# Altium PCB Acond_Presion_PCB.PcbDoc
Units mil, origin at the board's own origin, x right, y up, seen from the top; angles counter-clockwise.
Board outline 3940 x 1970 mil, 2 copper layers (Top Layer, Bottom Layer); 46 components, 32 nets, 126 pads, 0 vias.
Unrouted connection lines stored in the file: 1.
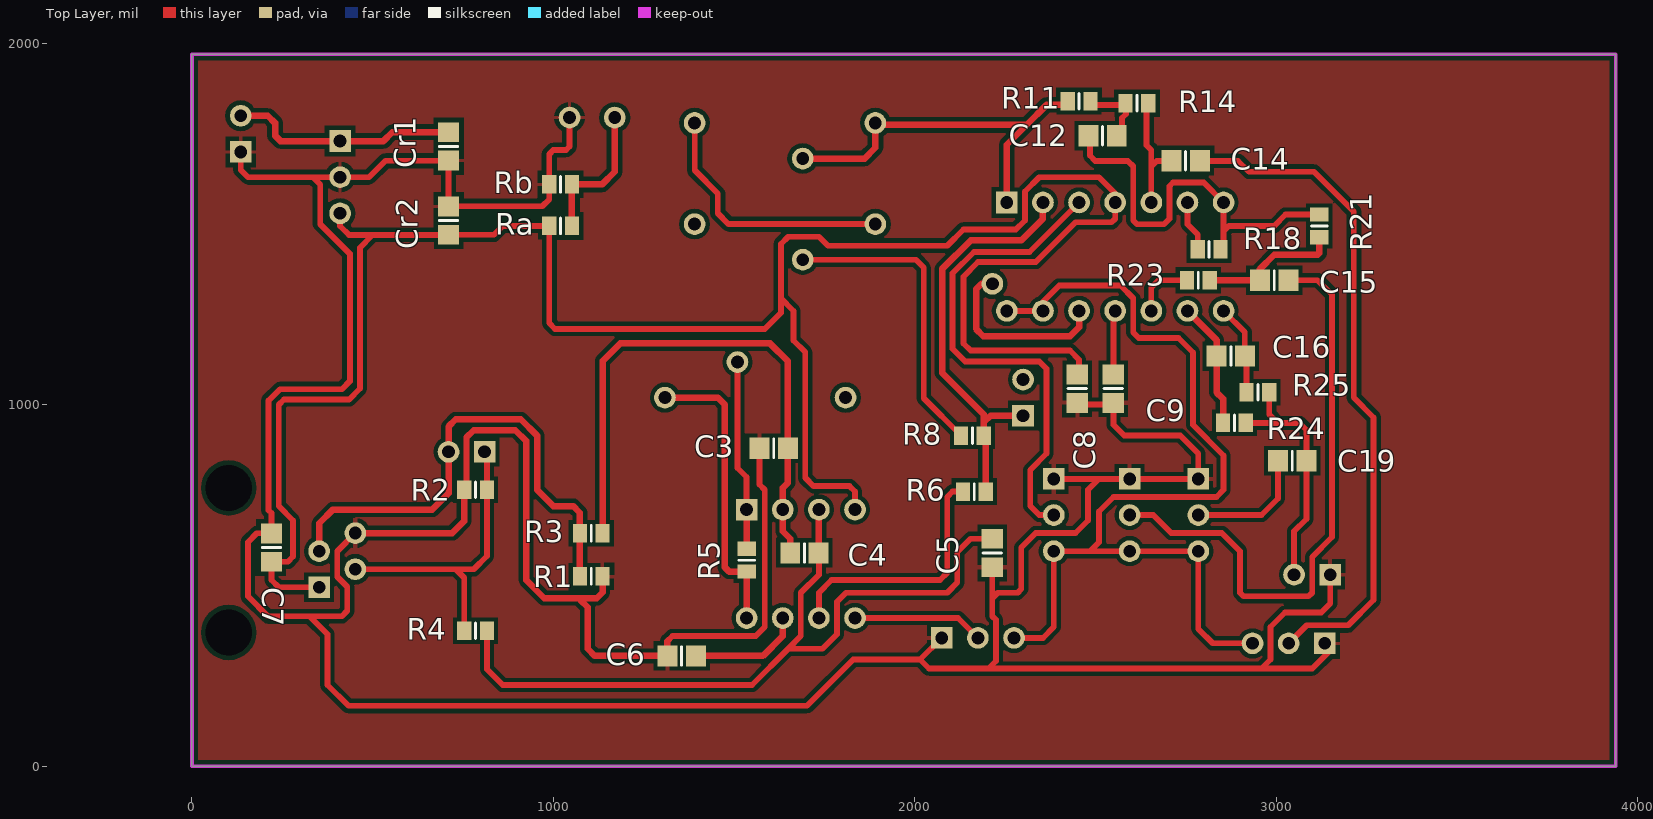
[diagram p0: Top Layer view]
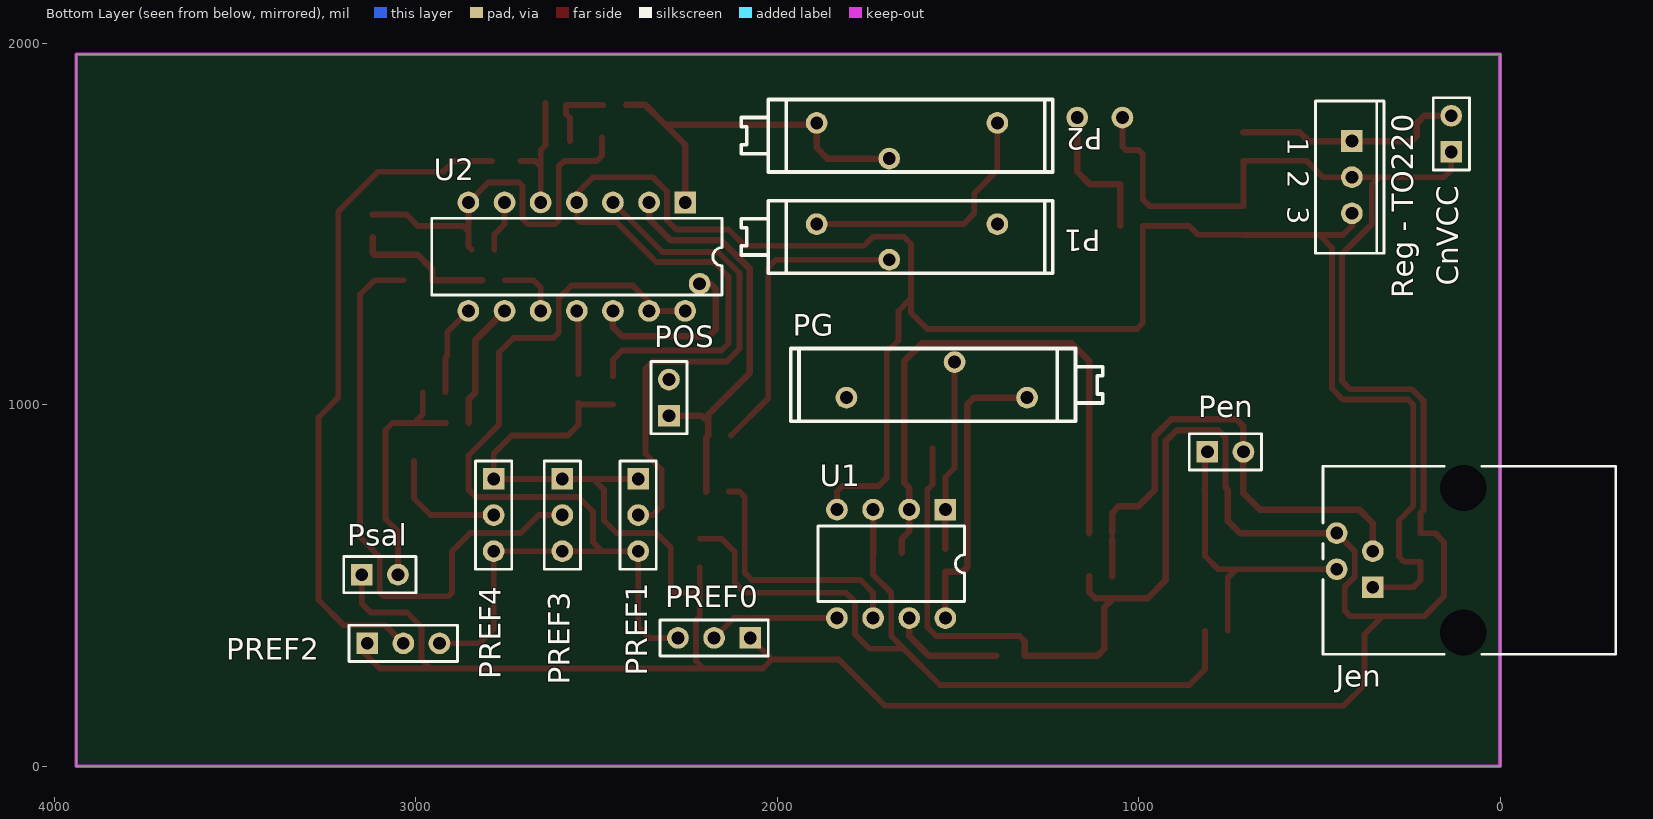
[diagram p1: Bottom Layer view, seen from below]

## Layer stack, top to bottom
Top Layer: signal copper 1.4
Dielectric: dielectric 12.6, FR-4, Dk 4.8
Bottom Layer: signal copper 1.4

## Board outline
0,1970 0,0 3940,0 3940,1970

## Design rules (kind name [scope] priority, off if disabled: settings)
Clearance [All] p1: gap=12
PolygonConnect [All] p1: connectstyle=Relief reliefconductorwidth=10 reliefentries=4 polygonreliefangle="90 Angle"
RoomDefinition Fuente_y_Referencia [InComponentClass('Fuente_y_Referencia')] p1: confinementstyle=ConfineIn formatcopy=TRUE lockcomponents=FALSE outline 0,875 2625,875 2625,1968.5 0,1968.5
RoomDefinition Acondicionamiento_Snl [InComponentClass('Acondicionamiento_Snl')] p2: confinementstyle=ConfineIn formatcopy=TRUE lockcomponents=FALSE outline -435,-5 3945,-5 3945,1970 -435,1970
RoutingCorners [All] p1: cornerstyle=45-Degree minsetback=50 maxsetback=100
RoutingLayers [All] p1: top layer_v5=TRUE bottom layer_v5=FALSE
RoutingTopology [All] p1: topology=Daisy_Balanced
RoutingVias [All] p1: holewidth=28 width=50 viastyle="Through Hole" minholewidth=28 minwidth=50 maxholewidth=28 maxwidth=50
SilkscreenOverComponentPads [All] p1: minsilkscreentomaskgap=1
SolderMaskExpansion [All] p1: expansion=4
Width [All] p1: maxlimit=20 minlimit=16 preferedwidth=18
24 further rules are at their usual default settings.

## Classes and differential pairs
component class Fuente_y_Referencia: C8 C9 CnVCC Cr1 Cr2 Ra Rb "Reg - TO220"
component class Acondicionamiento_Snl: C3 C4 C5 C6 C7 C12 C14 C15 C16 C19 Jen P1 P2 Pen PG POS PREF0 PREF1 PREF2 PREF3 PREF4 Psal R1 R2 R3 R4 R5 R6 R8 R11 R14 R18 R21 R23 R24 R25 U1 U2

## Components (designator, comment, footprint, x,y, rotation, side; value= is the part's Value field where it differs from the comment)
C3 "Cap" 6-0805_M 1610,880 r180 top
C4 "Cap" 6-0805_M 1695,590 r180 top
C5 "Cap" 6-0805_M 2215,590 r90 top
C6 "Cap" 6-0805_M 1355,305 r180 top
C7 "Cap" 6-0805_M 220,605 r90 top
C8 "Cap" 6-0805_M 2450,1045 r270 top
C9 "Cap" 6-0805_M 2550,1045 r270 top
C12 "Cap" 6-0805_M 2520,1745 r0 top
C14 "Cap" 6-0805_M 2750,1675 r0 top
C15 "Cap" 6-0805_M 2995,1345 r0 top
C16 "Cap" 6-0805_M 2875,1135 r180 top
C19 "Cap" 6-0805_M 3045,845 r180 top
CnVCC "Header 2" HDR1X2 135,1700 r90 bottom
Cr1 "Cap" 6-0805_M 710,1715 r270 top
Cr2 "Cap" 6-0805_M 710,1510 r90 top
Jen "15-43-8564" 15-43-8564 -320,570 r90 bottom
P1 "Preset" "Preset Largo" 2025,1565 r0 bottom
P2 "Preset" "Preset Largo" 2025,1845 r0 bottom
Pen "Header 2" HDR1X2 810,870 r180 bottom
PG "Preset" "Preset Largo" 1175,955 r180 bottom
POS "Header 2" HDR1X2 2300,970 r90 bottom
PREF0 "Header 3" HDR1X3 2075,355 r0 bottom
PREF1 "Header 3" HDR1X3 2385,795 r270 bottom
PREF2 "Header 3" HDR1X3 3135,340 r180 bottom
PREF3 "Header 3" HDR1X3 2595,795 r270 bottom
PREF4 "Header 3" HDR1X3 2785,795 r270 bottom
Psal "Header 2" HDR1X2 3150,530 r180 bottom
R1 "Res1" 6-0805_L 1105,525 r180 top
R2 "Res1" 6-0805_L 785,765 r0 top
R3 "Res1" 6-0805_L 1105,645 r180 top
R4 "Res1" 6-0805_L 785,375 r180 top
R5 "Res1" 6-0805_L 1535,570 r90 top
R6 "Res1" 6-0805_L 2165,760 r180 top
R8 "Res1" 6-0805_L 2160,915 r0 top
R11 "Res1" 6-0805_L 2455,1840 r180 top
R14 "Res1" 6-0805_L 2615,1835 r180 top
R18 "Res1" 6-0805_L 2815,1430 r180 top
R21 "Res1" 6-0805_L 3120,1495 r90 top
R23 "Res1" 6-0805_L 2785,1345 r0 top
R24 "Res1" 6-0805_L 2885,950 r180 top
R25 "Res1" 6-0805_L 2950,1035 r180 top
Ra "Res1" 6-0805_L 1020,1495 r180 top
Rb "Res1" 6-0805_L 1020,1610 r0 top
"Reg - TO220" "Volt Reg" TO-220-AB 410,1630 r270 bottom
U1 "AD620 / INA122" N-8 1685,560 r0 bottom
U2 "MC34074" Q-14 2555,1410 r0 bottom

## Footprints (in the part's own frame and the unit in brackets; to place one, negate y for a bottom-side part, rotate by r counter-clockwise, add the part's x,y. Pads: shape width x height; smd on the part's side, far side on the other; paste and mask are expansions set on the pad)
6-0805_L [mm] "Chip Resistor, Body 2.0x1.2mm, IPC High Density"
  rect 1x1.3 smd: 1(-0.8,0) 2(0.8,0)
  silkscreen extent 0,-0.55 0,0.55, body extent -1.07,-0.7 1.07,0.7, height 0.7
6-0805_M [mm] "Chip Resistor, Body 2.0x1.2mm, IPC Low Density"
  rect 1.4x1.5 smd: 1(-1,0) 2(1,0)
  silkscreen extent 0,-0.65 0,0.65, body extent -1.07,-0.7 1.07,0.7, height 0.7
15-43-8564 [mm] "Connector; PCB Jack, Thru-Hole; 1-Port, 6 Positions, 4 Loaded; Unshielded without Lightpipes; Right Angle"
  rect 1.524x1.524 hole 0.9: 1(-1.905,17.07)
  round 1.524 hole 0.9: 2(-0.635,19.61) 3(0.635,17.07) 4(1.905,19.61)
  round 2.95 hole 3.25 unplated: MH1(-5.08,10.72) MH2(5.08,10.72)
  silkscreen extent -6.6,0 6.61,20.57
HDR1X2 [mil] "Connector; Header; 2 Position"
  rect 60x60 hole 35.43: 1(0,0)
  round 60 hole 35.43: 2(100,0)
  silkscreen extent -50,-50 150,50
HDR1X3 [mil] "Connector; Header; 3 Position"
  rect 60x60 hole 35.43: 1(0,0)
  round 60 hole 35.43: 2(100,0) 3(200,0)
  silkscreen extent -50,-50 250,50
N-8 [mil] "DIP; 8 Leads; Row Spacing 7.62 mm; Pitch 2.54 mm"
  rect 60x60 hole 35.43: 1(-150,-150)
  round 60 hole 35.43: 2(-50,-150) 3(50,-150) 4(150,-150) 5(150,150) 6(50,150) 7(-50,150) 8(-150,150)
  silkscreen extent -203,-104 203,104
"Preset Largo" [mm] "4.8x19 Rectangular/Multiturn/Trimming Potentiometer"
  round 1.524 hole 0.9: 1(-3.4,1.65) 2(-8.5,4.15) 3(-16.1,1.65)
  silkscreen extent -20,0 1.91,5.1
Q-14 [mil] "DIP; 14 Leads; Row Spacing 7.62 mm; Pitch 2.54 mm"
  rect 60x60 hole 35.43: 1(-300,-150)
  round 60 hole 35.43: 2(-200,-150) 3(-100,-150) 4(0,-150) 5(100,-150) 6(200,-150) 7(300,-150) 8(300,150) 9(200,150) 10(100,150) 11(0,150) 12(-100,150) 13(-200,150) 14(-300,150)
  silkscreen extent -402,-106 402,106
TO-220-AB [mil] "TO, Thru-Hole, Vertical, Heatsink Mounted; 3 In-Line Leads; Pitch 2.54 mm"
  rect 60x60 hole 35.43: 1(-100,0)
  round 60 hole 35.43: 2(0,0) 3(100,0)
  silkscreen extent -211,-100 211,89

## Part data
C3 C4 C5 C6 C7 C8 C9 C12 C14 C15 C16 C19 Cr1 Cr2: "Capacitor"
CnVCC Pen POS Psal: "Header, 2-Pin"
Jen: "Right Angle, Standard Profile, Unshielded PCB Jack"
P1 P2 PG: library part "Preset Multivuelta", "Rectangular/Multiturn/Trimming Potentiometer"
PREF0 PREF1 PREF2 PREF3 PREF4: "Header, 3-Pin"
R1 R2 R3 R4 R5 R6 R8 R11 R14 R18 R21 R23 R24 R25 Ra Rb: "Resistor"
"Reg - TO220": "Voltage Regulator"
U1: library part AD620BN, "Low-Cost, Low-Power Instrumentation Amplifier"
U2: library part AD713BQ, "Quad Precision Low Cost High-Speed BiFET Operational Amplifier"

## Free pads (board coordinates)
  round 60 hole 35.43: 0(1045,1795) 1(1170,1795) 3(2215,1335)

## Nets (pads, with @x,y where several pads share a name; then routed paths per layer and width w, separated by ;. In a path a pad name is that pad's centre, name@x,y a point inside that pad or via, vN(x,y) a via of type N, cw(c..) or ccw(c..) an arc to the next point about the centre after c; other vN are vias at no path point)
GND: "Reg - TO220.2" C3.2 C5.1 C6.2 C7.2 C8.2 C9.2 CnVCC.1 Cr1.2 Cr2.2 Jen.4 pad.0 PREF0.1 PREF1.1 PREF2.1 PREF3.1 PREF4.1 Psal.1 R1.1 R2.1 Rb.1 | length 11260.8
  Top Layer w16: CnVCC.1 135,1650 155,1630 335,1630 ; Jen.4@452.05,647.95 Jen.4 402.05,595 402.05,524.29 430,496.34 430,430 415,415 325,415 ; R2.1 760,771.5 760,910 ; pad.0 1045,1715 1035,1705 1000,1705 988.5,1693.5 Rb.1 988.5,1568.5 969.37,1549.37 Cr2.2 Cr1.2 535.63,1675.63 490,1630 410,1630 335,1630 ; 1315.63,345.63 1330,360 1560,360 1585,385 1585,765 1570.63,779.37 C3.2 ; PREF0.1 2015,295 ; C5.1 2215,465 ; PREF1.1 2510,795 ; C8.2@2455,1000.63 2545,1000.63 C9.2 2550,945 2580,915 2735,915 2785,865 PREF4.1 PREF3.1 2510,795 ; PREF2.1@3150,320 3100,270 2960,270 ; Psal.1 3150,450 3125,425 3025,425 2985,385 2985,295.43 2960,270.43 2960,270 ; 325,415 375,365 375,225 433,167 1702,167 1830,295 2015,295 ; 325,415 210,415 155,470 155,620 179.37,644.37 C7.2 220,700.4 212,708.4 212,1011.6 243.4,1043 415,1043 437,1065 437,1418 355,1500 355,1610 335,1630 ; 2015,295 2040,270 2204.06,270 ; 2204.06,270 2225,290.94 2225,405 2215,415 2215,465 ; 2204.06,270 2960,270 ; 2215,465 2230,480 2285,480 2295,490 2295,605 2335,645 2445,645 2480,680 2480,765 2510,795
  Top Layer w18: Jen.4 720,645 753.5,678.5 R2.1 ; 760,910 780,930 895,930 925,900 925,515 975,465 1075,465 ; R1.1 1136.5,481.5 1120,465 1075,465 ; 1315.63,345.63 C6.2 1115,305 1095,325 1095,440 1075,460 1075,465
NetC3_1: C3.1 C4.2 R3.1 U1.2 | length 1575
  Top Layer w18: R3.1 1136.5,1121.5 1185,1170 1600,1170 1649.37,1120.63 C3.1 1649.37,784.37 1635,770 U1.2 1635,650 1655.63,629.37 C4.2
NetC4_1: C4.1 C5.2 R4.1 U1.3 | length 2214.2
  Top Layer w16: R4.1 816.5,268.5 860,225 1550.04,225 1650,324.96 ; C4.1@1735,589.37 1735,530 1685,480 1685,359.96 1650,324.96 ; C5.2 2154.37,629.37 2118,593 2118,508 2090,480 1810,480 1785,455 1785,365 1744.96,324.96 1650,324.96
  Top Layer w18: U1.3@1734.37,710.63 U1.3 C4.1@1735,589.37
NetC6_1: C6.1 U1.7 | length 313.4
  Top Layer w18: C6.1 1580,305 1635,360 U1.7
NetC9_1: C9.1 U2.11 | length 177.7
  Top Layer w16: C9.1 2550,1255 U2.11
NetC12_1: C12.1 R18.1 R21.2 U2.7 | length 1127.5
  Top Layer w16: C12.1@2485,1740 2485,1690 2500,1675 2590,1675 2605,1660 2605,1510 2615,1500 2690,1500 2705,1515 2705,1605 2715,1615 2800,1615 U2.7 2855,1480 ; R18.1 2855,1438.5 2855,1480 ; R21.2 3026.5,1526.5 2995,1495 2870,1495 2855,1480
NetC12_2: C12.2 R11.1 R14.2 | length 208.3
  Top Layer w16: R11.1@2481.5,1830 2585,1830 2585,1805 2573.5,1793.5 C12.2@2573.5,1730
NetC14_1: C14.1 R14.1 U2.5 | length 342.4
  Top Layer w16: R14.1@2641.5,1835 2641.5,1718.5 2655,1705 2655,1660 ; U2.5 2655,1660 ; C14.1 2670,1675 2655,1660
NetC14_2: C14.2 PREF2.2 | length 1866.1
  Top Layer w16: C14.2 2895,1675 2925,1645 3105,1645 3215,1535 3215,1020 3270,965 3270,460 3200,390 3085,390 PREF2.2
NetC15_1: C15.1 R21.1 R23.2 | length 396
  Top Layer w18: R23.2 C15.1 2955.63,1375.63 2995,1415 3115,1415 3120,1420 R21.1
NetC15_2: C15.2 PREF3.2 | length 1654.7
  Top Layer w16: PREF3.2 2660,695 2710,645 2850,645 2900,595 2900,480 2910,470 3090,470 3100,480 3100,579.06 3155,634.06 3155,1305 3115,1345 C15.2
NetC16_1: C16.1 R25.2 U2.8 | length 250.1
  Top Layer w16: U2.8 2913.5,1201.5 C16.1@2913.5,1135.87 ; C16.1 2918.5,1130.87 R25.2
NetC16_2: C16.2 R24.2 U2.9 | length 350.8
  Top Layer w18: U2.9 2835.63,1179.37 C16.2 2835.63,1034.37 2853.5,1016.5 R24.2
NetC19_2: C19.2 PREF4.2 | length 343.9
  Top Layer w16: PREF4.2 2960,695 3005.63,740.63 C19.2
NetCnVCC_2: "Reg - TO220.1" CnVCC.2 Cr1.1 | length 634.6
  Top Layer w18: CnVCC.2 210,1800 230,1780 230,1745 245,1730 410,1730 530,1730 554.37,1754.37 Cr1.1
NetP1_1: P1.1 P2.3 | length 725
  Top Layer w16: P2.3 1391.14,1648.86 1455,1585 1455,1530 1484.96,1500.04 P1.1
NetP1_2: P1.2 R8.1 | length 851.5
  Top Layer w16: P1.2 2003.39,1401.61 2025,1380 2025,1018.5 R8.1
NetP2_1: P2.1 P2.2 R11.2 U2.1 | length 1071.9
  Top Layer w18: P2.2 1861.61,1681.61 1891.14,1711.14 P2.1 1896.18,1775 2310,1775 ; U2.1 2255,1720 2310,1775 ; R11.2@2418.5,1830 2365,1830 2310,1775
NetPG_1: PG.1 R5.1 U1.8 | length 817.7
  Top Layer w18: PG.1 1455.04,1019.96 1475,1000 1475,550 1486.5,538.5 R5.1 U1.8
NetPG_2: PG.2 R5.2 U1.1 | length 527.4
  Top Layer w16: PG.2 1509.65,825.35 1535,800 U1.1
  Top Layer w18: R5.2 U1.1
NetPOS_1: POS.1 R6.1 R8.2 U2.2 | length 1163.7
  Top Layer w18: R6.1 2196.5,910 R8.2 2191.5,951.5 ; POS.1 2210,970 2191.5,951.5 ; U2.2 2355,1515 2295,1455 2155,1455 2076,1376 2076,1089 2191.5,973.5 2191.5,951.5
NetPREF0_2: PREF0.2 U1.5 | length 362.8
  Top Layer w16: U1.5 2120,410 PREF0.2
NetPREF1_2: PREF1.2 U2.3 | length 1397
  Top Layer w16: PREF1.2 2345,695 2320,720 2320,820 2365,865 2365,1100 2345,1120 2140,1120 2105,1155 2105,1363.99 2164.01,1423 2318,1423 U2.3
NetR6_2: R6.2 U1.6 | length 707.5
  Top Layer w16: U1.6 1735,480 1770,515 2070,515 2090,535 2090,745 2105,760 R6.2
NetR18_2: R18.2 U2.6 | length 141.8
  Top Layer w16: U2.6 2755,1500 2783.5,1471.5 R18.2
NetR23_1: R23.1 U2.10 | length 171.8
  Top Layer w16: U2.10 2655,1325 2675,1345 R23.1
NetRa_1: pad.1 pad.3 Ra.1 Rb.2 U2.12 | length 907.9
  Top Layer w18: Ra.1 Rb.2 1135,1610 1170,1645 pad.1 ; pad.3 2185,1335 2170,1320 2170,1210 2190,1190 2430,1190 2455,1215 U2.12
VCC: "Reg - TO220.3" C7.1 C8.1 Cr2.1 Jen.1 Ra.2 U1.4 U2.4 | length 6077.8
  Top Layer w16: Jen.1 240,495 220,515 C7.1 265.63,565.63 280,580 280,680 240,720 240,1000 255,1015 435,1015 465,1045 465,1435 500,1470 ; 410,1530 410,1495 435,1470 500,1470 ; U1.4 1835,760 1820,775 1720,775 1696.93,798.07 1696.93,1146.01 1665,1177.94 1665,1260 1630,1295 ; C8.1@2455,1079.37 2455,1125 2430,1150 2155,1150 2135,1170 2135,1354.39 2175.61,1395 2335,1395 2445,1505 2545,1505 2555,1515 U2.4 2555,1585 2510,1630 2345,1630 2305,1590 2305,1510 2280,1485 2135,1485 2090,1440 1760,1440 1735,1465 1650,1465 1630,1445 1630,1295 ; 500,1470 709.37,1470 Cr2.1 835.63,1470.63 860,1495 Ra.2 988.5,1226.5 1005,1210 1585,1210 1630,1255 1630,1295
VE_N: Jen.3 Pen.2 R1.2 R3.2 | length 1382.6
  Top Layer w18: Jen.3 352.05,672.05 390,710 665,710 710,755 Pen.2 710,940 730,960 910,960 955,915 955,765 1000,720 1055,720 1073.5,701.5 R3.2 ; R1.2 R3.2@1073.5,630
VE_P: Jen.2 Pen.1 R2.2 R4.2 | length 853.3
  Top Layer w16: Jen.2 730,545 ; R4.2 753.5,521.5 730,545 ; Pen.1 816.5,863.5 R2.2 ; R2.2@818.5,767.01 R2.2 ; 730,545 780,545 816.5,581.5 R2.2
VREF: PREF0.3 PREF1.3 PREF2.3 PREF3.3 PREF4.3 U2.13 U2.14 | length 2710.3
  Top Layer w16: U2.14 U2.13 2355,1285 2400,1330 2570,1330 2605,1295 2605,1200 2620,1185 2730,1185 2770,1145 2770,945 2855,860 2855,765 2835,745 2550,745 2510,705 2510,620 2485,595 ; PREF0.3 2355,355 2385,385 PREF1.3 2485,595 ; PREF2.3 2825,340 2785,380 PREF4.3 PREF3.3 2485,595
VSAL: C19.1 Psal.2 R24.1 R25.1 | length 685.5
  Top Layer w16: R24.1 3005,950 ; R25.1 2981.5,973.5 3005,950 ; Psal.2 3050,650 3084.37,684.37 C19.1 3084.37,930.63 3065,950 3005,950
pads on no net: Jen.MH1 Jen.MH2 P1.3 PG.3 POS.2

## Polygon pours and split planes (outlines as drawn)
GND on Top Layer "Plano_GND" (solid, pour order 3): 3940,1970 3940,0 0,0 0,1968.5

## Keep-outs
Keep-Out Layer:
  lines w10: 0,1968.5 0,0 3937.01,0 ; 0,1970 3940,1970 3940,0

## Dimensions
0,1968.5 to 0,0 on Keep-Out Layer
0,1968.5 to 3940,1970 on Keep-Out Layer

## Text inside footprints (layer, text, board x,y; h text height)
"Reg - TO220": Bottom Overlay "3" at 588.15,1549.68 h59.06 r90; Bottom Overlay "2" at 588.15,1649.68 h59.06 r90; Bottom Overlay "1" at 588.15,1739.84 h59.06 r90